# Altium PCB CT310高端控制盒核心板电路V1.3.PcbDoc (part 10 of 10)
Units mil, origin at the board's own origin, x right, y up, seen from the top; angles counter-clockwise.
Board outline 3735.76 x 4625 mil, 2 copper layers (TOP, BOTTOM), stack 10.4 mil thick; 198 components, 362 nets, 1085 pads, 352 vias.
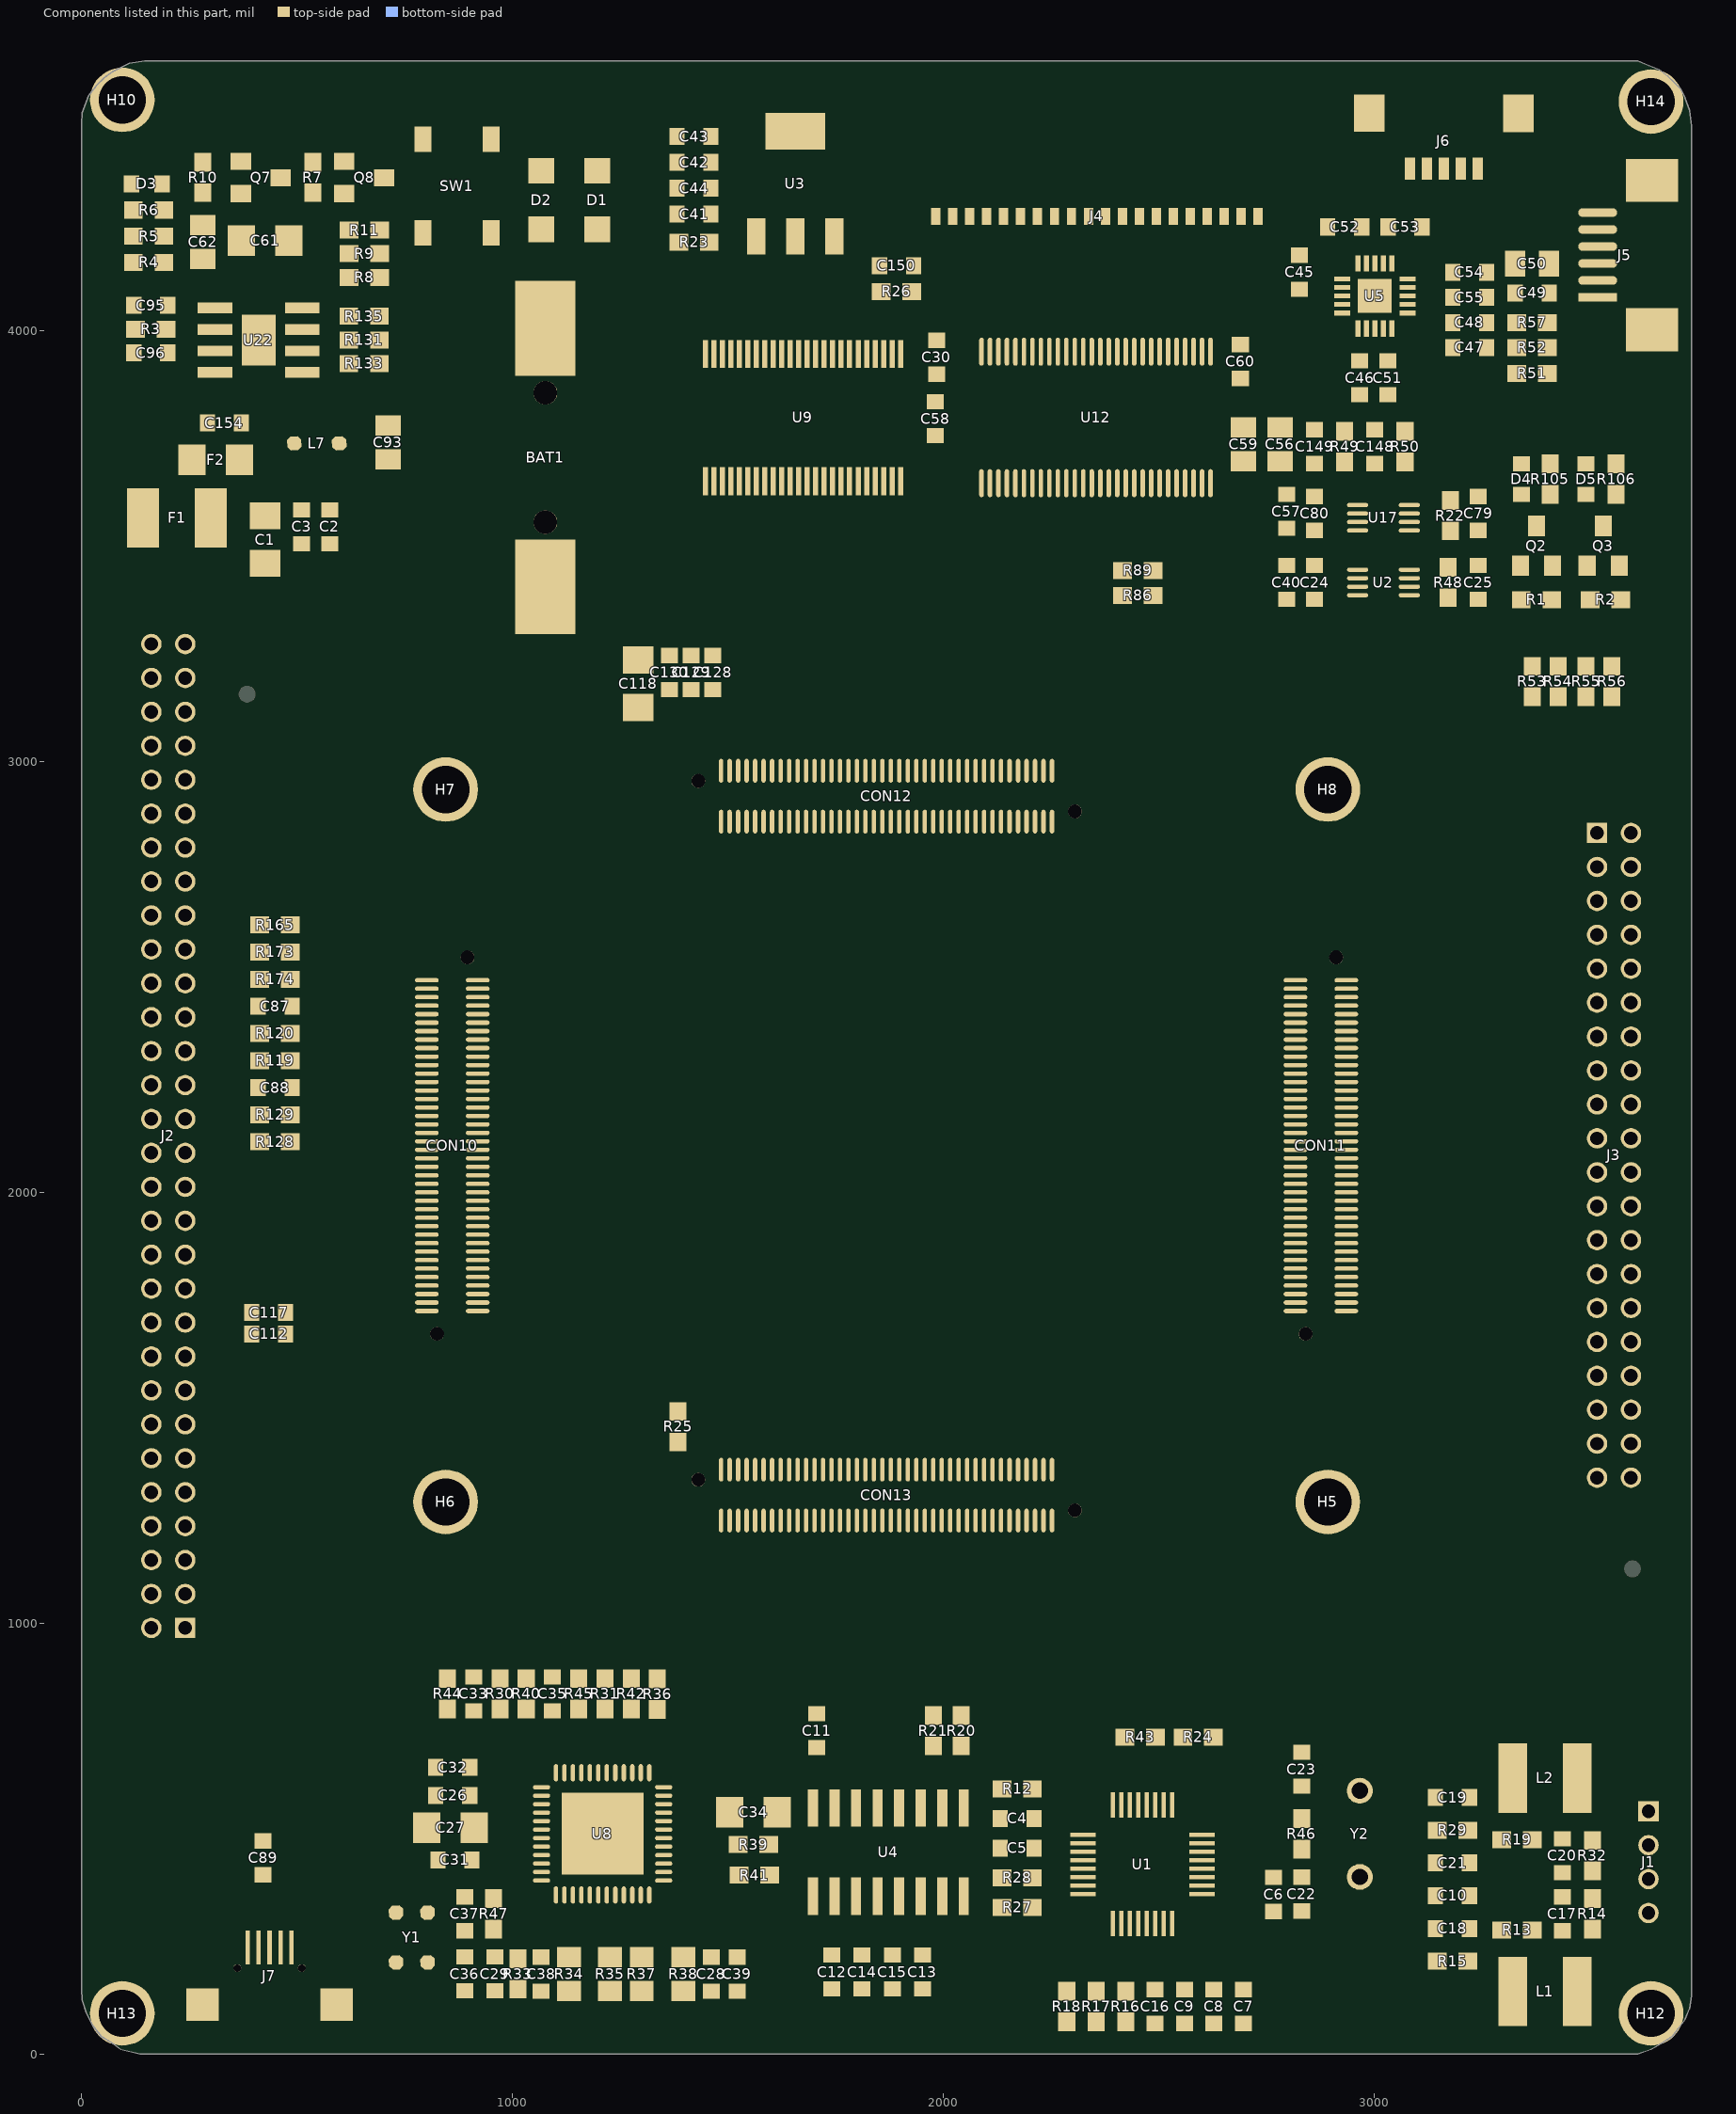
[diagram p10: the components of this part, seen from the top]

## Via types
v1: diameter 22, hole 12, TOP to BOTTOM, tented both sides, 177 vias
v2: diameter 22, hole 12, TOP to BOTTOM, 89 vias
v3: diameter 28, hole 16, TOP to BOTTOM, 37 vias
v4: diameter 30, hole 20, TOP to BOTTOM, tented both sides, 26 vias
v5: diameter 24, hole 12, TOP to BOTTOM, 17 vias
v6: diameter 50, hole 30, TOP to BOTTOM, tented both sides, 5 vias
v7: diameter 40, hole 24, TOP to BOTTOM, 1 vias

## Nets (pads, with @x,y where several pads share a name; then routed paths per layer and width w, separated by ;. In a path a pad name is that pad's centre, name@x,y a point inside that pad or via, vN(x,y) a via of type N, cw(c..) or ccw(c..) an arc to the next point about the centre after c; other vN are vias at no path point) (continued)
pads on no net: "BAT1. " "CON10. " "CON11. " "CON12. " "CON13. " CON12.11 CON12.13 CON12.71 CON12.73 H5.1 H6.1 H7.1 H8.1 H10.1 H12.1 H13.1 H14.1 J2.25 J2.26 J2.55 J2.56 J2.57 J2.58 J2.59 J2.60 J3.1 J3.2 J3.3 J3.4 J3.5 J3.6 J3.19 J3.20 J3.21 J3.22 J3.31 J3.32 J4.17 J4.18 J4.19 J4.20 J5.0 J6.0 J7. U1.23 U5.8 U5.19 U8.11 U8.14 U8.15 U8.17 U8.18 U8.19 U8.23 U8.25 U8.26 U8.27 U8.33 U8.35 U8.36 U9.14 U9.19 U9.22 U9.23 U9.26 U9.27 U9.30 U9.35 U12.37 U12.38 U22.8

## Polygon pours and split planes (outlines as drawn)
no net on Top Overlay (solid): 2738.06,2710.89 ccw(c2648.61,2710.89) 2648.61,2800.33 ccw(c2648.61,2710.89) 2559.17,2710.89 ccw(c2648.61,2710.89) 2648.61,2621.44 ccw(c2648.61,2710.89) 2738.06,2710.89
NetL7_1 on TOP "TOP-N64899462" (solid, pour order 7): 450.76,3912.85 450.76,3834.09 450.76,3781.58 450.76,3683.13 462.92,3670 499.4,3670 505.47,3676.56 505.47,3775.02 523.71,3794.71 523.71,3834.09 523.71,3840.65 560.19,3880.04 560.19,3906.29 554.11,3912.85 450.76,3912.85
DC33V on TOP "TOP-DC33V" (solid, pour order 15): 2250.61,1178.57 2250.61,1382.57 2324.61,1382.57 2324.61,1296.57 2278.61,1296.57 2278.61,1232.57 2311.61,1232.57 2311.61,1178.57 2250.61,1178.57
GND on TOP "TOP-GND 25" (solid, pour order 91): 183 vertices, not listed, extent 1539.1,2800.86 2495.1,3018.07
GND on TOP "TOP-GND 28" (solid, pour order 97): 2895.57,2333.84 2895.58,2333.84 2895.7,2333.96 2895.84,2334.07 2895.98,2334.17 2896.13,2334.25 2896.29,2334.32 2896.46,2334.38 2896.63,2334.42 2896.8,2334.45 2896.98,2334.46 2897.15,2334.46 2897.32,2334.44 2897.49,2334.4 2897.66,2334.36 2897.82,2334.29 2897.98,2334.22 2898.13,2334.13 2898.27,2334.02 2898.4,2333.91 2898.52,2333.78 2898.63,2333.65 2898.73,2333.5 2898.81,2333.35 2898.88,2333.19 2898.94,2333.02 2898.98,2332.85 2899.01,2332.68 2899.02,2332.51 2899.02,2332.46 2899.02,2266.69 2899.01,2266.34 2898.96,2266 2898.89,2265.66 2898.78,2265.32 2898.65,2265 2898.49,2264.69 2898.3,2264.4 2898.09,2264.12 2897.85,2263.86 2897.59,2263.63 2897.32,2263.41 2897.02,2263.23 2896.71,2263.07 2896.39,2262.93 2896.06,2262.83 2895.72,2262.75 2895.37,2262.71 2895.02,2262.69 2894.67,2262.71 2894.33,2262.75 2893.99,2262.83 2893.65,2262.93 2893.33,2263.07 2893.02,2263.23 2892.73,2263.41 2892.45,2263.63 2892.19,2263.86 2892.17,2263.89 2890.96,2265.02 2889.65,2266.04 2888.26,2266.94 2886.8,2267.72 2885.27,2268.37 2883.69,2268.88 2882.08,2269.25 2880.44,2269.49 2878.78,2269.57 2877.13,2269.51 2875.48,2269.31 2873.86,2268.97 2872.27,2268.48 2870.74,2267.86 2869.26,2267.11 2867.85,2266.23 2866.53,2265.24 2865.3,2264.13 2864.17,2262.91 2863.15,2261.61 2862.24,2260.22 2861.46,2258.75 2860.82,2257.23 2860.55,2256.47 2860.4,2256.02 2858.73,2254.35 2858.48,2254.12 2858.2,2253.9 2857.91,2253.72 2857.6,2253.55 2857.27,2253.42 2856.94,2253.32 2856.6,2253.24 2856.25,2253.2 2855.91,2253.18 2855.56,2253.2 2855.21,2253.24 2854.87,2253.32 2854.54,2253.42 2854.21,2253.56 2853.91,2253.72 2853.61,2253.9 2853.33,2254.12 2853.08,2254.35 2852.84,2254.61 2852.63,2254.89 2852.44,2255.18 2852.28,2255.49 2852.15,2255.81 2852.04,2256.15 2851.97,2256.49 2851.92,2256.83 2851.91,2257.18 2851.91,2281.9 2858.29,2281.9 2893.62,2317.23 2893.62,2331.69 2893.99,2332.06 2895.11,2333.28 2895.57,2333.84
GND on TOP "TOP-GND 30" (solid, pour order 101): 230 vertices, not listed, extent 836.16,2035.3 883.27,2200.84
GND on TOP "TOP-GND 32" (solid, pour order 105): 600.08,1992.95 555.67,2037.36 555.43,2037.62 555.22,2037.89 555.03,2038.19 554.87,2038.5 554.74,2038.82 554.63,2039.15 554.56,2039.49 554.51,2039.84 554.5,2040.19 554.51,2040.54 554.56,2040.88 554.63,2041.22 554.74,2041.56 554.87,2041.88 555.03,2042.19 555.22,2042.48 555.43,2042.76 555.67,2043.02 555.93,2043.25 556.2,2043.46 556.5,2043.65 556.81,2043.81 557.13,2043.95 557.46,2044.05 557.8,2044.13 558.15,2044.17 558.46,2044.19 560.37,2044.29 562.27,2044.56 564.14,2045 565.97,2045.59 567.73,2046.34 569.43,2047.25 571.04,2048.3 571.56,2048.69 625.75,2048.69 672.62,2001.81 725.36,2001.81 726.88,2001.88 728.4,2002.08 729.89,2002.41 731.34,2002.87 732.76,2003.45 734.11,2004.16 735.4,2004.98 735.86,2005.31 765.16,2005.31 765.16,1992.95 600.08,1992.95
GND on TOP "TOP-GND 82" (solid, pour order 205): 1407.43,2830.57 1388.62,2839.53 1388.62,3035.57 1483.23,3035.57 1503.62,3018.55 1503.62,3013.48 1487.6,3013.48 1487.6,3011.48 1450.23,3011.48 1450.23,2977.56 1450.22,2977.22 1450.17,2976.87 1450.09,2976.53 1449.99,2976.2 1449.86,2975.87 1449.69,2975.56 1449.51,2975.27 1449.29,2974.99 1449.06,2974.74 1448.8,2974.5 1448.52,2974.29 1448.23,2974.1 1447.92,2973.94 1447.6,2973.81 1447.27,2973.7 1446.92,2973.63 1446.58,2973.58 1446.23,2973.56 1445.88,2973.58 1445.54,2973.63 1445.19,2973.7 1444.86,2973.81 1444.54,2973.94 1444.23,2974.1 1443.99,2974.25 1442.21,2975.34 1440.34,2976.28 1438.39,2977.04 1436.38,2977.64 1434.33,2978.05 1432.25,2978.29 1430.15,2978.34 1428.06,2978.22 1425.99,2977.91 1423.96,2977.42 1421.97,2976.75 1420.05,2975.92 1418.21,2974.92 1416.47,2973.76 1414.83,2972.46 1413.31,2971.01 1411.92,2969.45 1410.68,2967.76 1409.58,2965.98 1408.65,2964.1 1407.88,2962.15 1407.29,2960.15 1406.87,2958.1 1406.63,2956.01 1406.58,2953.92 1406.71,2951.83 1407.02,2949.76 1407.51,2947.72 1408.17,2945.74 1409.01,2943.82 1410.01,2941.98 1411.16,2940.23 1412.47,2938.59 1413.91,2937.08 1415.48,2935.69 1417.16,2934.44 1418.95,2933.35 1420.82,2932.42 1422.77,2931.65 1424.78,2931.06 1426.83,2930.64 1428.91,2930.4 1431,2930.35 1433.09,2930.48 1435.16,2930.79 1437.2,2931.28 1439.18,2931.94 1441.11,2932.78 1442.94,2933.78 1444.69,2934.93 1446.33,2936.24 1447.85,2937.68 1449.23,2939.25 1450.48,2940.93 1451.57,2942.71 1452.46,2944.47 1487.6,2944.47 1487.6,2942.47 1503.68,2942.47 1505.58,2941.87 1507.1,2941.39 1507.1,2895.36 1487.6,2895.36 1487.6,2893.36 1450.23,2893.36 1450.23,2830.57 1407.43,2830.57
GND on TOP "TOP-GND 93" (solid, pour order 227): 623.47,1923.1 623.29,1923.4 623.14,1923.71 623.02,1924.04 622.93,1924.38 622.87,1924.72 622.84,1925.07 622.84,1925.42 622.87,1925.77 622.93,1926.11 623.02,1926.45 623.14,1926.78 623.29,1927.09 623.46,1927.39 623.66,1927.68 623.88,1927.95 624.13,1928.2 624.4,1928.42 624.68,1928.62 624.98,1928.8 625.3,1928.94 625.63,1929.06 625.97,1929.15 626.31,1929.22 626.66,1929.25 626.84,1929.25 756.59,1929.25 758.27,1927.57 765.16,1927.57 765.16,1910.65 626.78,1910.65 626.63,1910.8 626.61,1912.55 626.52,1914.29 626.27,1916.02 625.87,1917.72 625.33,1919.38 624.64,1920.98 623.82,1922.52 623.47,1923.1
GND on TOP "TOP-GND 96" (solid, pour order 233): 680.56,1867.15 680.36,1867.44 680.19,1867.74 680.04,1868.06 679.92,1868.39 679.83,1868.73 679.78,1869.07 679.75,1869.42 679.75,1869.77 679.78,1870.11 679.85,1870.46 679.94,1870.79 680.06,1871.12 680.21,1871.44 680.38,1871.74 680.59,1872.02 680.81,1872.29 681.06,1872.53 681.33,1872.76 681.55,1872.91 763.96,1872.91 765.16,1871.71 765.16,1850.81 687.27,1850.81 684.61,1853.46 684.61,1854.89 684.62,1854.89 684.56,1856.63 684.34,1858.36 683.98,1860.07 683.47,1861.74 682.82,1863.36 682.03,1864.91 681.11,1866.39 680.56,1867.15
GND on TOP "TOP-GND 99" (solid, pour order 239): 836.16,1778.75 836.16,1809.69 836.17,1810.04 836.22,1810.38 836.29,1810.72 836.4,1811.06 836.53,1811.38 836.69,1811.69 836.88,1811.98 837.09,1812.26 837.33,1812.52 837.59,1812.75 837.86,1812.97 838.16,1813.15 838.47,1813.31 838.79,1813.45 839.12,1813.55 839.46,1813.63 839.81,1813.67 840.16,1813.69 840.51,1813.67 840.85,1813.63 841.19,1813.55 841.53,1813.45 841.85,1813.31 842.02,1813.23 843.6,1812.48 845.24,1811.88 846.92,1811.42 848.64,1811.1 850.37,1810.94 852.12,1810.93 853.86,1811.08 855.58,1811.37 857.27,1811.81 858.91,1812.4 860.49,1813.13 862.01,1814 863.44,1814.99 864.79,1816.11 866.03,1817.33 867.16,1818.66 868.16,1820.09 869.04,1821.59 869.79,1823.17 870.39,1824.81 870.86,1826.49 870.97,1827.03 871.29,1828.64 883.27,1828.64 883.27,1778.75 836.16,1778.75
GND on TOP "TOP-GND 101" (solid, pour order 243): 2857.11,2045.68 2878,2066.57 2886.26,2066.57 2886.33,2068.17 2887.35,2068.7 2888.79,2069.53 2890.15,2070.47 2891.42,2071.54 2892.17,2072.25 2892.42,2072.49 2892.7,2072.71 2892.99,2072.9 2893.3,2073.06 2893.62,2073.2 2893.95,2073.31 2894.29,2073.38 2894.64,2073.43 2894.99,2073.45 2895.34,2073.44 2895.68,2073.4 2896.02,2073.32 2896.36,2073.22 2896.68,2073.09 2896.99,2072.93 2897.29,2072.75 2897.57,2072.54 2897.83,2072.3 2898.06,2072.05 2898.28,2071.77 2898.47,2071.48 2898.63,2071.17 2898.77,2070.85 2898.88,2070.52 2898.95,2070.18 2899,2069.83 2899.02,2069.49 2899.02,2069.45 2899.02,1739.04 2875.73,1739.04 2875.41,1739.15 2874.07,1739.55 2872.7,1739.83 2871.32,1740 2869.92,1740.04 2868.53,1739.96 2867.15,1739.75 2865.79,1739.43 2864.89,1739.15 2864.57,1739.04 2851.91,1739.04 2851.91,2045.68 2857.11,2045.68
GND on TOP "TOP-GND 103" (solid, pour order 247): 2225.58,1273.31 2225.58,1292.7 2204.68,1313.6 2204.44,1313.86 2204.23,1314.13 2204.04,1314.43 2203.88,1314.74 2203.75,1315.06 2203.65,1315.39 2203.57,1315.73 2203.52,1316.08 2203.51,1316.43 2203.52,1316.78 2203.57,1317.12 2203.65,1317.46 2203.75,1317.8 2203.88,1318.12 2204.05,1318.43 2204.23,1318.72 2204.45,1319 2204.68,1319.26 2204.94,1319.49 2205.22,1319.71 2205.51,1319.89 2205.82,1320.05 2206.14,1320.19 2206.47,1320.29 2206.82,1320.37 2207.16,1320.41 2207.51,1320.43 2235.61,1320.43 2235.61,1273.31 2225.58,1273.31
GND on TOP "TOP-GND 104" (solid, pour order 249): 2403.78,1105.76 2326.62,1182.93 2326.62,1251.87 2326.77,1252.24 2327.49,1254.2 2328.03,1256.23 2328.4,1258.29 2328.58,1260.37 2328.58,1262.47 2328.4,1264.55 2328.04,1266.62 2327.5,1268.64 2326.79,1270.61 2325.9,1272.5 2324.86,1274.32 2324.22,1275.26 2324.22,1275.27 2324.03,1275.56 2323.87,1275.87 2323.74,1276.19 2323.63,1276.52 2323.56,1276.86 2323.51,1277.21 2323.49,1277.56 2323.51,1277.91 2323.55,1278.25 2323.63,1278.59 2323.73,1278.93 2323.86,1279.25 2324.02,1279.56 2324.21,1279.85 2324.42,1280.13 2324.66,1280.39 2324.91,1280.63 2325.19,1280.84 2325.48,1281.03 2325.79,1281.19 2326.11,1281.32 2326.45,1281.43 2326.79,1281.51 2327.13,1281.55 2327.48,1281.57 2327.49,1281.57 2339.62,1281.57 2339.62,1397.57 2245.27,1397.57 2244.93,1397.59 2244.58,1397.63 2244.24,1397.71 2243.91,1397.81 2243.58,1397.95 2243.28,1398.11 2242.98,1398.3 2242.7,1398.51 2242.45,1398.75 2242.21,1399 2242,1399.28 2241.81,1399.57 2241.65,1399.88 2241.52,1400.21 2241.41,1400.54 2241.34,1400.88 2241.29,1401.23 2241.28,1401.57 2241.29,1401.92 2241.34,1402.27 2241.41,1402.61 2241.52,1402.94 2241.65,1403.26 2241.81,1403.57 2242,1403.87 2242.21,1404.14 2242.45,1404.4 2245.61,1407.57 2309,1407.57 2403.78,1502.35 2404.04,1502.59 2404.32,1502.8 2404.61,1502.99 2404.92,1503.15 2405.24,1503.28 2405.58,1503.39 2405.92,1503.46 2406.26,1503.51 2406.61,1503.52 2406.96,1503.51 2407.31,1503.46 2407.65,1503.39 2407.98,1503.28 2408.3,1503.15 2408.61,1502.99 2408.91,1502.8 2409.18,1502.59 2409.44,1502.35 2409.68,1502.09 2409.89,1501.82 2410.08,1501.52 2410.24,1501.21 2410.37,1500.89 2410.48,1500.56 2410.55,1500.22 2410.6,1499.87 2410.61,1499.53 2410.61,1108.59 2410.6,1108.24 2410.55,1107.89 2410.48,1107.55 2410.37,1107.22 2410.24,1106.9 2410.08,1106.59 2409.89,1106.29 2409.68,1106.02 2409.44,1105.76 2409.18,1105.52 2408.91,1105.31 2408.61,1105.12 2408.3,1104.96 2407.98,1104.83 2407.65,1104.72 2407.31,1104.65 2406.96,1104.6 2406.61,1104.59 2406.26,1104.6 2405.92,1104.65 2405.58,1104.72 2405.24,1104.83 2404.92,1104.96 2404.61,1105.12 2404.32,1105.31 2404.04,1105.52 2403.78,1105.76
GND on TOP "TOP-GND 127" (solid, pour order 295): 1094.88,396.84 1094.88,624.3 1322.34,624.3 1322.34,396.84 1094.88,396.84
GND on TOP "TOP-GND 97" (solid, pour order 235): 954.28,1849.71 954.28,1887.2 966.39,1887.2 969.73,1890.54 978.46,1890.54 987.61,1881.39 987.61,1853.29 987.6,1852.94 987.55,1852.59 987.48,1852.25 987.37,1851.92 987.24,1851.6 987.08,1851.29 986.89,1850.99 986.68,1850.71 986.44,1850.46 986.18,1850.22 985.91,1850.01 985.61,1849.82 985.3,1849.66 984.98,1849.53 984.65,1849.42 984.31,1849.35 983.96,1849.3 983.61,1849.29 983.26,1849.3 982.92,1849.35 982.58,1849.42 982.24,1849.53 981.92,1849.66 981.87,1849.68 980.35,1850.34 978.78,1850.86 977.16,1851.24 975.52,1851.48 973.87,1851.57 972.21,1851.52 970.56,1851.33 968.94,1850.99 967.35,1850.51 965.81,1849.9 964.33,1849.15 962.92,1848.28 961.59,1847.29 960.94,1846.73 960.67,1846.51 960.38,1846.31 960.08,1846.14 959.76,1846 959.43,1845.88 959.1,1845.8 958.75,1845.74 958.4,1845.72 958.05,1845.72 957.71,1845.75 957.36,1845.82 957.03,1845.91 956.7,1846.04 956.39,1846.19 956.09,1846.37 955.8,1846.57 955.54,1846.8 955.29,1847.05 955.07,1847.32 954.88,1847.6 954.71,1847.91 954.56,1848.23 954.45,1848.56 954.36,1848.89 954.3,1849.24 954.28,1849.59 954.28,1849.71
GND on BOTTOM "BOTTOM-GND 11" (solid, pour order 323): 289 vertices, not listed, extent 2004.8,2730.57 2103.61,3172.07
GND on BOTTOM "BOTTOM-GND 12" (solid, pour order 325): 2729.04,2682.9 2727.75,2684.32 2726.34,2685.62 2724.82,2686.79 2723.2,2687.83 2721.5,2688.72 2719.73,2689.46 2717.9,2690.04 2716.03,2690.47 2715.71,2690.52 2715.08,2690.62 2696.67,2709.03 2696.67,3251.68 2697.42,3252.74 2697.53,3252.88 2697.64,3253.01 2697.77,3253.13 2697.91,3253.24 2698.05,3253.33 2698.2,3253.42 2698.36,3253.49 2698.53,3253.54 2698.7,3253.58 2698.87,3253.61 2699.05,3253.62 2699.22,3253.61 2699.39,3253.59 2699.57,3253.56 2699.73,3253.51 2699.89,3253.45 2700.05,3253.37 2700.2,3253.28 2700.34,3253.17 2700.47,3253.06 2700.59,3252.93 2700.7,3252.8 2700.71,3252.78 2701.11,3252.24 2701.11,3224.94 2736.11,3189.94 2736.11,2685.46 2736.1,2685.11 2736.05,2684.76 2735.98,2684.42 2735.87,2684.09 2735.74,2683.77 2735.58,2683.46 2735.39,2683.16 2735.18,2682.89 2734.94,2682.63 2734.68,2682.39 2734.41,2682.18 2734.11,2681.99 2733.8,2681.83 2733.48,2681.7 2733.15,2681.6 2732.81,2681.52 2732.46,2681.47 2732.11,2681.46 2731.76,2681.47 2731.42,2681.52 2731.08,2681.6 2730.74,2681.7 2730.42,2681.83 2730.11,2681.99 2729.82,2682.18 2729.54,2682.39 2729.28,2682.63 2729.05,2682.89 2729.04,2682.9
GND on BOTTOM "BOTTOM-GND 32" (solid, pour order 365): 280 vertices, not listed, extent 1853.02,2698.57 2003.17,2745.58
no net on Mechanical 16 (solid): 3607.98,-459.43 ccw(c3568.61,-459.43) 3568.61,-420.06 ccw(c3568.61,-459.43) 3529.24,-459.43 ccw(c3568.61,-459.43) 3568.61,-498.8 ccw(c3568.61,-459.43) 3607.98,-459.43
no net on PLACE_BOUND_TOP (solid): 3637.98,1125.57 ccw(c3598.61,1125.57) 3598.61,1164.94 ccw(c3598.61,1125.57) 3559.24,1125.57 ccw(c3598.61,1125.57) 3598.61,1086.2 ccw(c3598.61,1125.57) 3637.98,1125.57
no net on PLACE_BOUND_TOP (solid): 422.98,3155.57 ccw(c383.61,3155.57) 383.61,3194.94 ccw(c383.61,3155.57) 344.24,3155.57 ccw(c383.61,3155.57) 383.61,3116.2 ccw(c383.61,3155.57) 422.98,3155.57

## Keep-outs
TOP:
  circle w1: c3598.61,1125.57 r39.37
  circle w1: c3598.61,1125.57 r39.37
  circle w1: c383.61,3155.57 r39.37
  circle w1: c383.61,3155.57 r39.37
Keep-Out Layer:
  lines w5: 0,150 ccw(c150,150) 150,0 ; 0,150.76 0,4479.24 ; 0,4475 cw(c150,4475) 150,4625 ; 138.26,0 235.76,0 275.76,40 590.76,40 630.76,0 645.76,0 3590.76,0 ; 145.76,4625 3585.76,4625 cw(c3585.76,4475) 3735.76,4475 3735.76,145 ; 3585.76,0 ccw(c3585.76,150) 3735.76,150

## Other copper
TOP:
  rectangle net NetL7_1: 470.76,3675 525.76,3850
  rectangle net VSYS_K: 555.76,3630 645.76,3805
  rectangle net VSYS_K: 960.76,1610 1105.76,1705
  rectangle net VSYS_K: 870.76,1610 960.76,1715
  rectangle net VSYS_K: 515.82,1715 960.76,1768.41
  rectangle: 3015.76,4460 3120.76,4550
  rectangle: 1860.76,4380 1940.76,4585
  rectangle: 2770.76,4380 2850.76,4580
  region net VSYS_K: 1105.76,1610 1205.76,1610 1220.76,1625 1220.76,1755 1285.76,1820 1285.76,2415 1230.76,2415 1230.76,1830 1100.76,1700
  pour cut-out: 919.62,2544.91 917.75,2554.27 912.45,2562.21 904.51,2567.52 895.14,2569.38 885.78,2567.52 877.84,2562.21 872.54,2554.27 870.67,2544.91 872.54,2535.54 877.84,2527.6 885.78,2522.3 895.14,2520.43 904.51,2522.3 912.45,2527.6 917.75,2535.54 919.62,2544.91
  pour cut-out: 925.65,1280.91 924.09,1296.79 919.46,1312.06 911.94,1326.13 901.81,1338.46 889.48,1348.59 875.41,1356.11 860.14,1360.74 844.26,1362.3 828.38,1360.74 813.11,1356.11 799.04,1348.59 786.71,1338.46 776.58,1326.13 769.06,1312.06 764.43,1296.79 762.87,1280.91 764.43,1265.03 769.06,1249.76 776.58,1235.69 786.71,1223.36 799.04,1213.23 813.11,1205.71 828.38,1201.08 844.26,1199.52 860.14,1201.08 875.41,1205.71 889.48,1213.23 901.81,1223.36 911.94,1235.69 919.46,1249.76 924.09,1265.03 925.65,1280.91
  pour cut-out: 925.65,2934.45 924.09,2950.33 919.46,2965.6 911.94,2979.67 901.81,2992 889.48,3002.13 875.41,3009.65 860.14,3014.28 844.26,3015.84 828.38,3014.28 813.11,3009.65 799.04,3002.13 786.71,2992 776.58,2979.67 769.06,2965.6 764.43,2950.33 762.87,2934.45 764.43,2918.57 769.06,2903.3 776.58,2889.23 786.71,2876.89 799.04,2866.77 813.11,2859.25 828.38,2854.62 844.26,2853.06 860.14,2854.62 875.41,2859.25 889.48,2866.77 901.81,2876.89 911.94,2889.23 919.46,2903.3 924.09,2918.57 925.65,2934.45
  pour cut-out: 2973.01,2934.45 2971.45,2950.33 2966.82,2965.6 2959.29,2979.67 2949.17,2992 2936.84,3002.13 2922.77,3009.65 2907.5,3014.28 2891.62,3015.84 2875.74,3014.28 2860.47,3009.65 2846.4,3002.13 2834.06,2992 2823.94,2979.67 2816.42,2965.6 2811.79,2950.33 2810.22,2934.45 2811.79,2918.57 2816.42,2903.3 2823.94,2889.23 2834.06,2876.89 2846.4,2866.77 2860.47,2859.25 2875.74,2854.62 2891.62,2853.06 2907.5,2854.62 2922.77,2859.25 2936.84,2866.77 2949.17,2876.89 2959.29,2889.23 2966.82,2903.3 2971.45,2918.57 2973.01,2934.45
  pour cut-out: 2972.91,1280.91 2971.35,1296.79 2966.72,1312.06 2959.2,1326.13 2949.07,1338.46 2936.74,1348.59 2922.67,1356.11 2907.4,1360.74 2891.52,1362.3 2875.64,1360.74 2860.37,1356.11 2846.3,1348.59 2833.97,1338.46 2823.84,1326.13 2816.32,1312.06 2811.69,1296.79 2810.13,1280.91 2811.69,1265.03 2816.32,1249.76 2823.84,1235.69 2833.97,1223.36 2846.3,1213.23 2860.37,1205.71 2875.64,1201.08 2891.52,1199.52 2907.4,1201.08 2922.67,1205.71 2936.74,1213.23 2949.07,1223.36 2959.2,1235.69 2966.72,1249.76 2971.35,1265.03 2972.91,1280.91
  pour cut-out: 1107.61,409.57 1107.61,611.57 1309.62,611.57 1309.62,409.57 1107.61,409.57
  pour cut-out: 2233.86,3103.07 2482.81,3103.07 2483.16,3103.05 2483.51,3103.01 2483.85,3102.93 2484.18,3102.83 2484.5,3102.69 2484.81,3102.53 2485.11,3102.35 2485.38,3102.13 2485.64,3101.9 2485.88,3101.64 2486.09,3101.36 2486.28,3101.07 2486.44,3100.76 2486.57,3100.44 2486.67,3100.1 2486.75,3099.76 2486.8,3099.42 2486.81,3099.07 2486.8,3098.72 2486.75,3098.37 2486.67,3098.03 2486.57,3097.7 2486.44,3097.38 2486.27,3097.07 2486.09,3096.77 2485.87,3096.5 2485.64,3096.24 2484.47,3095.07 2235.52,3095.07 2235.18,3095.09 2234.83,3095.13 2234.49,3095.21 2234.16,3095.31 2233.83,3095.45 2233.52,3095.61 2233.23,3095.8 2232.95,3096.01 2232.7,3096.25 2232.46,3096.5 2232.25,3096.78 2232.06,3097.07 2231.9,3097.38 2231.77,3097.71 2231.66,3098.04 2231.59,3098.38 2231.54,3098.73 2231.52,3099.07 2231.54,3099.42 2231.59,3099.77 2231.66,3100.11 2231.77,3100.44 2231.9,3100.76 2232.06,3101.07 2232.25,3101.37 2232.46,3101.64 2232.7,3101.9 2233.86,3103.07
  pour cut-out: 2481.36,3053.07 2246.61,3053.07 2245.09,3053.01 2243.57,3052.81 2242.08,3052.48 2240.63,3052.02 2239.22,3051.43 2238.31,3050.98 2237,3050.27 2234.53,3052.74 2241.86,3060.07 2483.53,3060.07 2483.71,3060.06 2483.88,3060.04 2484.05,3060 2484.22,3059.95 2484.38,3059.88 2484.53,3059.8 2484.68,3059.71 2484.82,3059.6 2484.95,3059.48 2485.06,3059.35 2485.17,3059.22 2485.26,3059.07 2485.34,3058.91 2485.41,3058.75 2485.46,3058.59 2485.5,3058.42 2485.52,3058.24 2485.53,3058.07 2485.52,3057.89 2485.5,3057.72 2485.46,3057.55 2485.41,3057.38 2485.34,3057.22 2485.26,3057.07 2485.17,3056.92 2485.06,3056.78 2484.95,3056.65 2481.36,3053.07
  pour cut-out: 1547.61,4031.01 1552.61,4026.01 1552.61,4019.24 1549.34,4015.96 1549.34,3985.78 1538.97,3985.78 1538.97,4054.61 1541.21,4056.85 1542.93,4055.14 1543.08,4054.74 1543.85,4052.98 1544.76,4051.3 1545.82,4049.7 1547.02,4048.2 1547.61,4047.54
  pour cut-out: 2052.43,3103.73 2054.08,3103.59 2055.74,3103.59 2056.86,3103.67 2057.21,3103.69 2057.56,3103.68 2057.91,3103.64 2058.25,3103.57 2058.59,3103.47 2058.91,3103.34 2059.22,3103.19 2059.52,3103 2059.8,3102.8 2060.06,3102.56 2060.3,3102.31 2060.52,3102.04 2060.71,3101.75 2060.87,3101.44 2061.01,3101.12 2061.12,3100.79 2061.2,3100.45 2061.26,3100.1 2061.28,3099.75 2061.28,3099.69 2061.28,3013.48 2047.91,3013.48 2047.91,3099.76 2047.93,3100.11 2047.97,3100.46 2048.05,3100.8 2048.15,3101.13 2048.29,3101.46 2048.45,3101.76 2048.63,3102.06 2048.85,3102.34 2049.08,3102.59 2049.34,3102.83 2049.62,3103.04 2049.91,3103.23 2050.22,3103.39 2050.54,3103.52 2050.88,3103.63 2051.22,3103.7 2051.56,3103.75 2051.91,3103.76 2052.26,3103.75 2052.43,3103.73
  pour cut-out: 1897.26,3103.54 1903.8,3097 1903.8,3013.48 1890.43,3013.48 1890.43,3100.71 1890.45,3101.06 1890.49,3101.4 1890.57,3101.75 1890.67,3102.08 1890.81,3102.4 1890.97,3102.71 1891.15,3103 1891.37,3103.28 1891.6,3103.54 1891.86,3103.77 1892.14,3103.99 1892.43,3104.17 1892.74,3104.33 1893.06,3104.47 1893.4,3104.57 1893.74,3104.65 1894.08,3104.69 1894.43,3104.71 1894.78,3104.69 1895.13,3104.65 1895.47,3104.57 1895.8,3104.47 1896.12,3104.33 1896.43,3104.17 1896.73,3103.99 1897,3103.77 1897.26,3103.54
  pour cut-out: 2970.02,2527.25 2935.34,2527.25 2934.99,2527.27 2934.65,2527.31 2934.31,2527.39 2933.97,2527.49 2933.65,2527.63 2933.34,2527.79 2933.05,2527.98 2932.77,2528.19 2932.51,2528.42 2932.28,2528.68 2932.06,2528.96 2931.88,2529.25 2931.72,2529.56 2931.58,2529.88 2931.48,2530.22 2931.4,2530.56 2931.36,2530.9 2931.34,2531.25 2931.36,2531.6 2931.4,2531.95 2931.48,2532.29 2931.58,2532.62 2931.72,2532.94 2931.85,2533.2 2932.79,2535.07 2933.56,2537.02 2934.16,2539.03 2934.59,2541.08 2934.83,2543.16 2934.89,2545.25 2934.77,2547.34 2934.47,2549.41 2933.99,2551.45 2933.72,2552.33 2933.62,2552.67 2933.56,2553.01 2933.53,2553.36 2933.52,2553.71 2933.55,2554.06 2933.61,2554.4 2933.7,2554.74 2933.81,2555.07 2933.96,2555.38 2934.13,2555.69 2934.33,2555.98 2934.55,2556.24 2934.79,2556.49 2935.06,2556.72 2935.34,2556.92 2935.64,2557.1 2935.96,2557.25 2936.28,2557.37 2936.62,2557.47 2936.96,2557.53 2937.31,2557.56 2937.52,2557.57 2963.23,2557.57 2984.37,2536.43 2984.37,2484.12 2976.85,2476.6 2976.59,2476.36 2976.32,2476.15 2976.02,2475.96 2975.71,2475.8 2975.39,2475.67 2975.06,2475.56 2974.72,2475.49 2974.37,2475.44 2974.02,2475.43 2973.67,2475.44 2973.33,2475.49 2972.99,2475.56 2972.66,2475.67 2972.33,2475.8 2972.02,2475.96 2971.73,2476.15 2971.45,2476.36 2971.2,2476.6 2970.96,2476.86 2970.75,2477.13 2970.56,2477.43 2970.4,2477.74 2970.26,2478.06 2970.16,2478.39 2970.08,2478.73 2970.04,2479.08 2970.02,2479.43 2970.02,2527.25
  pour cut-out: 3638.33,1125.57 3636.97,1135.85 3633.01,1145.43 3626.7,1153.65 3618.47,1159.96 3608.89,1163.93 3598.61,1165.28 3588.34,1163.93 3578.76,1159.96 3570.53,1153.65 3564.22,1145.43 3560.25,1135.85 3558.9,1125.57 3560.25,1115.29 3564.22,1105.71 3570.53,1097.49 3578.76,1091.18 3588.34,1087.21 3598.61,1085.86 3608.89,1087.21 3618.47,1091.18 3626.7,1097.49 3633.01,1105.71 3636.97,1115.29 3638.33,1125.57
  pour cut-out: 423.33,3155.57 421.97,3165.85 418.01,3175.43 411.7,3183.65 403.47,3189.96 393.89,3193.93 383.61,3195.28 373.34,3193.93 363.76,3189.96 355.53,3183.65 349.22,3175.43 345.25,3165.85 343.9,3155.57 345.25,3145.29 349.22,3135.71 355.53,3127.49 363.76,3121.18 373.34,3117.21 383.61,3115.86 393.89,3117.21 403.47,3121.18 411.7,3127.49 418.01,3135.71 421.97,3145.29 423.33,3155.57
BOTTOM:
  pour cut-out: 163 vertices and 0 holes, not listed, extent 1543.35,3718.92 1940.61,3894.64
  pour cut-out: 848.76,1670.88 846.9,1680.25 841.59,1688.19 833.65,1693.49 824.29,1695.35 814.92,1693.49 806.98,1688.19 801.68,1680.25 799.81,1670.88 801.68,1661.52 806.98,1653.58 814.92,1648.27 824.29,1646.41 833.65,1648.27 841.59,1653.58 846.9,1661.52 848.76,1670.88
  pour cut-out: 1455.05,1332.3 1453.19,1341.66 1447.88,1349.6 1439.94,1354.91 1430.58,1356.77 1421.21,1354.91 1413.27,1349.6 1407.97,1341.66 1406.11,1332.3 1407.97,1322.93 1413.27,1314.99 1421.21,1309.69 1430.58,1307.83 1439.94,1309.69 1447.88,1314.99 1453.19,1322.93 1455.05,1332.3
  pour cut-out: 925.65,2934.45 924.09,2950.33 919.46,2965.6 911.94,2979.67 901.81,2992 889.48,3002.13 875.41,3009.65 860.14,3014.28 844.26,3015.84 828.38,3014.28 813.11,3009.65 799.04,3002.13 786.71,2992 776.58,2979.67 769.06,2965.6 764.43,2950.33 762.87,2934.45 764.43,2918.57 769.06,2903.3 776.58,2889.23 786.71,2876.89 799.04,2866.77 813.11,2859.25 828.38,2854.62 844.26,2853.06 860.14,2854.62 875.41,2859.25 889.48,2866.77 901.81,2876.89 911.94,2889.23 919.46,2903.3 924.09,2918.57 925.65,2934.45
  pour cut-out: 1455.05,2954.35 1453.19,2963.71 1447.88,2971.65 1439.94,2976.96 1430.58,2978.82 1421.21,2976.96 1413.27,2971.65 1407.97,2963.71 1406.11,2954.35 1407.97,2944.98 1413.27,2937.04 1421.21,2931.74 1430.58,2929.87 1439.94,2931.74 1447.88,2937.04 1453.19,2944.98 1455.05,2954.35
  pour cut-out: 2329.07,2883.49 2327.21,2892.85 2321.91,2900.79 2313.97,2906.1 2304.6,2907.96 2295.24,2906.1 2287.3,2900.79 2281.99,2892.85 2280.13,2883.49 2281.99,2874.12 2287.3,2866.18 2295.24,2860.88 2304.6,2859.02 2313.97,2860.88 2321.91,2866.18 2327.21,2874.12 2329.07,2883.49
  pour cut-out: 2329.07,1261.44 2327.21,1270.81 2321.91,1278.75 2313.97,1284.05 2304.6,1285.91 2295.24,1284.05 2287.3,1278.75 2281.99,1270.81 2280.13,1261.44 2281.99,1252.08 2287.3,1244.14 2295.24,1238.83 2304.6,1236.97 2313.97,1238.83 2321.91,1244.14 2327.21,1252.08 2329.07,1261.44
  pour cut-out: 2972.91,1280.91 2971.35,1296.79 2966.72,1312.06 2959.2,1326.13 2949.07,1338.46 2936.74,1348.59 2922.67,1356.11 2907.4,1360.74 2891.52,1362.3 2875.64,1360.74 2860.37,1356.11 2846.3,1348.59 2833.97,1338.46 2823.84,1326.13 2816.32,1312.06 2811.69,1296.79 2810.13,1280.91 2811.69,1265.03 2816.32,1249.76 2823.84,1235.69 2833.97,1223.36 2846.3,1213.23 2860.37,1205.71 2875.64,1201.08 2891.52,1199.52 2907.4,1201.08 2922.67,1205.71 2936.74,1213.23 2949.07,1223.36 2959.2,1235.69 2966.72,1249.76 2971.35,1265.03 2972.91,1280.91
  pour cut-out: 798.44,2361.01 975.79,2361.01 985.23,2351.57 990.2,2351.57 990.2,2348.11 989.33,2347.83 987.76,2347.3 986.24,2346.64 984.78,2345.84 983.4,2344.92 982.11,2343.89 981.1,2342.94 980.73,2342.57 789.66,2342.57 789.31,2342.59 788.97,2342.63 788.62,2342.71 788.29,2342.81 787.97,2342.95 787.66,2343.11 787.37,2343.3 787.09,2343.51 786.83,2343.75 786.6,2344 786.38,2344.28 786.2,2344.57 786.04,2344.88 785.9,2345.21 785.8,2345.54 785.72,2345.88 785.68,2346.23 785.66,2346.57 785.68,2346.92 785.72,2347.27 785.8,2347.61 785.9,2347.94 786.04,2348.26 786.2,2348.57 786.38,2348.87 786.6,2349.14 786.83,2349.4 798.44,2361.01
  pour cut-out: 2011.74,3173.97 2011.89,3174.04 2012.06,3174.1 2012.22,3174.15 2012.4,3174.18 2012.57,3174.2 2012.74,3174.2 2012.92,3174.19 2013.09,3174.16 2013.26,3174.12 2013.42,3174.06 2013.58,3173.99 2013.74,3173.9 2013.88,3173.81 2014.01,3173.69 2014.14,3173.57 2014.25,3173.44 2014.35,3173.3 2014.44,3173.15 2014.52,3172.99 2014.58,3172.83 2014.63,3172.66 2014.66,3172.49 2014.68,3172.33 2014.85,3170.68 2015.17,3169.06 2015.64,3167.47 2016.23,3165.92 2016.97,3164.43 2017.82,3163.01 2018.8,3161.67 2019.89,3160.43 2021.09,3159.28 2022.38,3158.24 2023.76,3157.31 2025.21,3156.51 2026.72,3155.84 2028.29,3155.31 2029.9,3154.91 2031.54,3154.66 2033.19,3154.55 2034.85,3154.58 2036.5,3154.76 2037.16,3154.87 2037.17,3154.87 2037.51,3154.92 2037.86,3154.94 2038.21,3154.93 2038.55,3154.89 2038.9,3154.82 2039.23,3154.72 2039.55,3154.59 2039.87,3154.43 2040.16,3154.24 2040.44,3154.03 2040.7,3153.8 2040.94,3153.55 2041.16,3153.27 2041.35,3152.98 2041.51,3152.67 2041.65,3152.35 2041.76,3152.02 2041.84,3151.68 2041.89,3151.34 2041.91,3150.99 2041.91,3150.94 2041.91,3136.45 2041.54,3136.08 2040.41,3134.86 2039.39,3133.55 2038.49,3132.16 2037.72,3130.69 2037.08,3129.16 2036.57,3127.58 2036.2,3125.97 2035.98,3124.32 2035.9,3122.67 2035.9,3122.38 2035.9,3121.95 1996.88,3082.93 1996.62,3082.69 1996.35,3082.48 1996.05,3082.29 1995.74,3082.13 1995.42,3082 1995.09,3081.9 1994.75,3081.82 1994.4,3081.77 1994.05,3081.76 1993.7,3081.77 1993.36,3081.82 1993.02,3081.9 1992.68,3082 1992.36,3082.13 1992.05,3082.3 1991.76,3082.48 1991.48,3082.7 1991.22,3082.93 1990.99,3083.19 1990.77,3083.47 1990.59,3083.76 1990.43,3084.07 1990.29,3084.39 1990.19,3084.72 1990.11,3085.07 1990.07,3085.41 1990.05,3085.76 1990.05,3159.62 2002.14,3171.71 2010.4,3171.71 2010.47,3173.31 2011.5,3173.84 2011.74,3173.97
  pour cut-out: 1930.62,3110.76 1930.63,3111.11 1930.68,3111.46 1930.75,3111.8 1930.86,3112.13 1930.99,3112.46 1931.15,3112.76 1931.34,3113.06 1931.55,3113.34 1931.79,3113.59 1932.04,3113.83 1932.32,3114.04 1932.62,3114.23 1932.93,3114.39 1933.25,3114.52 1933.58,3114.63 1933.92,3114.7 1934.27,3114.75 1934.62,3114.76 1934.96,3114.75 1935.14,3114.73 1936.79,3114.59 1938.45,3114.59 1940.1,3114.73 1941.73,3115.02 1941.74,3115.02 1942.09,3115.08 1942.43,3115.12 1942.78,3115.12 1943.13,3115.09 1943.47,3115.02 1943.81,3114.93 1944.14,3114.82 1944.46,3114.67 1944.76,3114.49 1945.04,3114.29 1945.31,3114.07 1945.56,3113.82 1945.78,3113.56 1945.98,3113.27 1946.16,3112.97 1946.31,3112.65 1946.43,3112.33 1946.52,3111.99 1946.58,3111.64 1946.61,3111.3 1946.61,3111.12 1946.61,3080.96 1937.44,3071.79 1937.19,3071.55 1936.91,3071.34 1936.62,3071.15 1936.31,3070.99 1935.98,3070.86 1935.65,3070.75 1935.31,3070.68 1934.96,3070.63 1934.62,3070.62 1934.27,3070.63 1933.92,3070.68 1933.58,3070.75 1933.25,3070.86 1932.92,3070.99 1932.62,3071.15 1932.32,3071.34 1932.04,3071.55 1931.79,3071.79 1931.55,3072.05 1931.34,3072.32 1931.15,3072.62 1930.99,3072.93 1930.86,3073.25 1930.75,3073.58 1930.68,3073.92 1930.63,3074.27 1930.62,3074.62 1930.62,3110.76
  pour cut-out: 1952.62,3050.19 1957.22,3054.79 1957.48,3055.02 1957.75,3055.24 1958.05,3055.42 1958.36,3055.59 1958.68,3055.72 1959.01,3055.82 1959.35,3055.9 1959.7,3055.94 1960.05,3055.96 1960.4,3055.94 1960.74,3055.9 1961.08,3055.82 1961.42,3055.72 1961.74,3055.58 1962.05,3055.42 1962.34,3055.24 1962.62,3055.02 1962.88,3054.79 1963.11,3054.53 1963.32,3054.25 1963.51,3053.96 1963.67,3053.65 1963.81,3053.33 1963.91,3052.99 1963.99,3052.65 1964.03,3052.31 1964.05,3051.96 1964.05,2783.51 1964.04,2783.34 1964.02,2783.17 1963.98,2783 1963.93,2782.83 1963.86,2782.67 1963.78,2782.51 1963.69,2782.37 1963.58,2782.23 1963.46,2782.1 1963.33,2781.98 1963.2,2781.88 1963.05,2781.78 1962.89,2781.7 1962.73,2781.63 1962.57,2781.58 1962.4,2781.54 1962.22,2781.52 1962.2,2781.52 1960.55,2781.32 1958.93,2780.99 1957.83,2780.67 1957.5,2780.58 1957.15,2780.52 1956.81,2780.49 1956.46,2780.49 1956.11,2780.51 1955.76,2780.57 1955.43,2780.66 1955.1,2780.78 1954.78,2780.93 1954.48,2781.1 1954.19,2781.3 1953.92,2781.52 1953.68,2781.77 1953.45,2782.04 1953.25,2782.32 1953.07,2782.62 1952.93,2782.94 1952.81,2783.26 1952.71,2783.6 1952.65,2783.94 1952.62,2784.29 1952.62,2784.48 1952.62,3050.19
  pour cut-out: 2093.14,2899.73 2094.79,2899.59 2096.45,2899.59 2098.1,2899.73 2099.73,2900.02 2100.57,2900.23 2100.91,2900.3 2101.26,2900.35 2101.6,2900.37 2101.95,2900.35 2102.3,2900.31 2102.64,2900.23 2102.97,2900.13 2103.3,2899.99 2103.6,2899.83 2103.9,2899.65 2104.18,2899.43 2104.43,2899.2 2104.67,2898.94 2104.88,2898.67 2105.07,2898.37 2105.23,2898.06 2105.37,2897.74 2105.47,2897.41 2105.55,2897.07 2105.6,2896.72 2105.61,2896.37 2105.61,2775.96 2100.41,2770.76 2100.15,2770.52 2099.88,2770.31 2099.58,2770.12 2099.27,2769.96 2098.95,2769.82 2098.62,2769.72 2098.28,2769.64 2097.93,2769.6 2097.58,2769.58 2097.23,2769.6 2096.89,2769.64 2096.55,2769.72 2096.21,2769.82 2095.89,2769.96 2095.58,2770.12 2095.29,2770.31 2095.01,2770.52 2094.75,2770.75 2094.52,2771.01 2094.42,2771.13 2093.44,2772.47 2092.35,2773.71 2091.99,2774.08 2091.62,2774.45 2091.62,2784.96 2088.62,2787.96 2088.62,2895.76 2088.63,2896.11 2088.68,2896.46 2088.75,2896.8 2088.86,2897.13 2088.99,2897.46 2089.15,2897.76 2089.34,2898.06 2089.55,2898.34 2089.79,2898.59 2090.04,2898.83 2090.32,2899.04 2090.62,2899.23 2090.93,2899.39 2091.25,2899.52 2091.58,2899.63 2091.92,2899.7 2092.27,2899.75 2092.62,2899.76 2092.96,2899.75 2093.14,2899.73
  pour cut-out: 1772.64,2764.93 1772.64,3036.71 1773.8,3037.9 1774.85,3039.18 1775.79,3040.55 1776.6,3042 1777.28,3043.51 1777.83,3045.07 1778.24,3046.68 1778.51,3048.31 1778.63,3049.97 1778.61,3051.62 1778.57,3052.23 1778.49,3053.16 1780.56,3055.24 1785.61,3050.19 1785.61,2761.62 1785.6,2761.27 1785.55,2760.92 1785.48,2760.58 1785.37,2760.25 1785.24,2759.93 1785.08,2759.62 1784.89,2759.32 1784.68,2759.05 1784.44,2758.79 1784.18,2758.55 1783.91,2758.34 1783.61,2758.15 1783.3,2757.99 1782.98,2757.86 1782.65,2757.75 1782.31,2757.68 1781.96,2757.63 1781.61,2757.62 1781.26,2757.63 1780.92,2757.68 1780.58,2757.75 1780.24,2757.86 1779.92,2757.99 1779.61,2758.15 1779.32,2758.34 1779.04,2758.55 1778.78,2758.79 1772.64,2764.93
  pour cut-out: 2654.72,2709.21 2654.72,3248.63 2655.82,3250.21 2656.77,3251.87 2657.22,3252.78 2657.3,3252.94 2657.39,3253.09 2657.5,3253.23 2657.61,3253.36 2657.74,3253.47 2657.88,3253.58 2658.03,3253.68 2658.18,3253.76 2658.34,3253.82 2658.51,3253.88 2658.68,3253.92 2658.85,3253.94 2659.02,3253.95 2659.2,3253.94 2659.37,3253.92 2659.54,3253.88 2659.71,3253.83 2659.87,3253.77 2660.03,3253.69 2660.17,3253.59 2660.31,3253.49 2660.44,3253.37 2660.56,3253.24 2660.67,3253.11 2660.71,3253.04 2661.67,3251.68 2661.67,2707.1 2661.66,2706.92 2661.64,2706.75 2661.6,2706.58 2661.55,2706.42 2661.48,2706.25 2661.4,2706.1 2661.3,2705.95 2661.2,2705.81 2661.08,2705.68 2660.95,2705.57 2660.81,2705.46 2660.67,2705.37 2660.51,2705.29 2660.35,2705.22 2660.18,2705.17 2660.01,2705.13 2659.84,2705.11 2659.67,2705.1 2659.49,2705.11 2659.32,2705.13 2659.15,2705.17 2658.98,2705.22 2658.82,2705.29 2658.67,2705.37 2658.52,2705.46 2658.38,2705.57 2658.25,2705.69 2654.72,2709.21
  pour cut-out: 2732.94,2091.32 2732.95,2091.32 2732.74,2091.04 2732.5,2090.78 2732.25,2090.54 2731.97,2090.33 2731.68,2090.14 2731.37,2089.97 2731.05,2089.84 2730.72,2089.73 2730.38,2089.65 2730.03,2089.6 2729.68,2089.58 2729.34,2089.6 2728.99,2089.64 2728.65,2089.71 2728.31,2089.81 2727.99,2089.94 2727.68,2090.1 2727.38,2090.28 2727.1,2090.49 2726.85,2090.73 2726.82,2090.76 2701.62,2115.96 2701.62,2130.53 2701.63,2130.87 2701.68,2131.22 2701.75,2131.56 2701.86,2131.89 2701.99,2132.22 2702.15,2132.52 2702.34,2132.82 2702.55,2133.1 2702.79,2133.35 2703.05,2133.59 2703.32,2133.8 2703.62,2133.99 2703.93,2134.15 2704.25,2134.28 2704.58,2134.39 2704.92,2134.46 2705.27,2134.51 2705.62,2134.52 2705.97,2134.51 2706.31,2134.46 2706.65,2134.39 2706.98,2134.28 2707.31,2134.15 2707.62,2133.99 2707.91,2133.8 2708.19,2133.59 2708.44,2133.35 2739.03,2102.77 2739.27,2102.51 2739.48,2102.23 2739.67,2101.94 2739.83,2101.63 2739.96,2101.31 2740.07,2100.97 2740.14,2100.63 2740.19,2100.29 2740.2,2099.94 2740.19,2099.59 2740.14,2099.24 2740.07,2098.9 2739.96,2098.57 2739.83,2098.25 2739.67,2097.94 2739.48,2097.64 2739.27,2097.37 2739.03,2097.11 2738.77,2096.87 2738.5,2096.66 2738.36,2096.57 2737.01,2095.62 2735.74,2094.55 2734.57,2093.37 2733.51,2092.1 2732.94,2091.32
  pour cut-out: 834.64,1982.57 834.99,1982.55 835.33,1982.51 835.67,1982.43 836.01,1982.33 836.33,1982.19 836.64,1982.03 836.93,1981.85 837.21,1981.63 837.47,1981.4 837.7,1981.14 837.91,1980.86 838.1,1980.57 838.26,1980.26 838.4,1979.94 838.5,1979.6 838.58,1979.26 838.62,1978.92 838.64,1978.57 838.62,1978.22 838.58,1977.87 838.5,1977.53 838.4,1977.2 838.26,1976.88 838.1,1976.57 837.94,1976.31 837.06,1974.9 836.31,1973.42 835.69,1971.89 835.21,1970.3 834.87,1968.68 834.67,1967.03 834.66,1966.99 834.53,1965.14 739.43,1965.14 728.83,1975.74 728.6,1976 728.38,1976.28 728.2,1976.57 728.03,1976.88 727.9,1977.2 727.8,1977.53 727.72,1977.88 727.68,1978.22 727.66,1978.57 727.68,1978.92 727.72,1979.26 727.8,1979.6 727.9,1979.94 728.04,1980.26 728.2,1980.57 728.38,1980.86 728.6,1981.14 728.83,1981.4 729.09,1981.63 729.37,1981.85 729.66,1982.03 729.97,1982.19 730.29,1982.33 730.63,1982.43 730.97,1982.51 731.31,1982.55 731.66,1982.57 834.64,1982.57

## Silkscreen, mask and mechanical layers (free items; w line width, h text height)
Top Overlay:
  pour cut-out: 2678.61,2665.57 2678.61,2695.57 2583.61,2695.57 2583.61,2725.57 2678.61,2725.57 2678.61,2755.57 2723.61,2710.57 2678.61,2665.57
  lines w6: 489.93,1320.27 489.93,926.57 795.76,926.57 ; 489.93,2895.07 489.93,3288.77 883.63,3288.77 ; 2852.13,926.57 3245.83,926.57 3245.83,1320.27 ; 686.78,1123.42 686.78,3091.93 3048.99,3091.93 3048.99,1123.42 686.78,1123.42
  text "POP & SCP" at 1865.28,1818.57 h80 r90
Top Solder:
  rectangle: 575.76,3680 640.76,3800
  rectangle: 455.76,3685 515.76,3795
  rectangle: 3025.76,4460 3120.76,4550
  rectangle: 2775.76,4385 2845.76,4575
  rectangle: 1865.76,4385 1935.76,4580
OUTLINE:
  lines w5: 0,150 ccw(c150,150) 150,0

## Dimensions
235.76,0 to 145.76,4625 on Keep-Out Layer
0,150.76 to 3735.76,145 on Keep-Out Layer

## Text inside footprints (layer, text, board x,y; h text height)
BAT1: PIN_NUMBER "2" at 1085.76,3405 h25 r90; PIN_NUMBER "1" at 1085.76,4005 h25 r90
CON10: PIN_NUMBER "1" at 690.66,1724.04 h25 r90; PIN_NUMBER "2" at 1008.77,1724.04 h25 r90; PIN_NUMBER "4" at 1008.77,1743.72 h25 r90; PIN_NUMBER "3" at 690.66,1743.72 h25 r90; PIN_NUMBER "5" at 690.66,1763.41 h25 r90; PIN_NUMBER "6" at 1008.77,1763.41 h25 r90; PIN_NUMBER "60" at 998.77,2294.91 h25 r90; PIN_NUMBER "69" at 680.66,2393.32 h25 r90; PIN_NUMBER "48" at 998.77,2176.79 h25 r90; PIN_NUMBER "17" at 680.66,1881.51 h25 r90; PIN_NUMBER "10" at 998.77,1802.78 h25 r90; PIN_NUMBER "14" at 998.77,1842.15 h25 r90; PIN_NUMBER "58" at 998.77,2275.21 h25 r90; PIN_NUMBER "56" at 998.77,2255.54 h25 r90; PIN_NUMBER "13" at 680.66,1842.15 h25 r90; PIN_NUMBER "16" at 998.77,1861.83 h25 r90; PIN_NUMBER "11" at 680.66,1822.47 h25 r90; PIN_NUMBER "19" at 680.66,1901.21 h25 r90; PIN_NUMBER "43" at 680.66,2137.42 h25 r90; PIN_NUMBER "41" at 680.66,2117.73 h25 r90; PIN_NUMBER "37" at 680.66,2078.36 h25 r90; PIN_NUMBER "40" at 998.77,2098.06 h25 r90; PIN_NUMBER "38" at 998.77,2078.36 h25 r90; PIN_NUMBER "42" at 998.77,2117.73 h25 r90; PIN_NUMBER "12" at 998.77,1822.47 h25 r90; PIN_NUMBER "76" at 998.77,2452.38 h25 r90; PIN_NUMBER "75" at 680.66,2452.38 h25 r90; PIN_NUMBER "33" at 680.66,2038.99 h25 r90; PIN_NUMBER "30" at 998.77,1999.62 h25 r90; PIN_NUMBER "59" at 680.66,2294.91 h25 r90; PIN_NUMBER "28" at 998.77,1979.94 h25 r90; PIN_NUMBER "26" at 998.77,1960.25 h25 r90; PIN_NUMBER "25" at 680.66,1960.25 h25 r90; PIN_NUMBER "23" at 680.66,1940.58 h25 r90; PIN_NUMBER "27" at 680.66,1979.94 h25 r90; PIN_NUMBER "31" at 680.66,2019.31 h25 r90; PIN_NUMBER "47" at 680.66,2176.79 h25 r90; PIN_NUMBER "46" at 998.77,2157.1 h25 r90; PIN_NUMBER "74" at 998.77,2432.69 h25 r90; PIN_NUMBER "22" at 998.77,1920.88 h25 r90; PIN_NUMBER "36" at 998.77,2058.69 h25 r90; PIN_NUMBER "35" at 680.66,2058.69 h25 r90; PIN_NUMBER "52" at 998.77,2216.17 h25 r90; PIN_NUMBER "20" at 998.77,1901.21 h25 r90; PIN_NUMBER "78" at 998.77,2472.06 h25 r90; PIN_NUMBER "77" at 680.66,2472.06 h25 r90; PIN_NUMBER "45" at 680.66,2157.1 h25 r90; PIN_NUMBER "73" at 680.66,2432.69 h25 r90; PIN_NUMBER "54" at 998.77,2235.84 h25 r90; PIN_NUMBER "44" at 998.77,2137.42 h25 r90; PIN_NUMBER "71" at 680.66,2413.01 h25 r90; PIN_NUMBER "8" at 1008.77,1783.1 h25 r90; PIN_NUMBER "15" at 680.66,1861.83 h25 r90; PIN_NUMBER "18" at 998.77,1881.51 h25 r90; PIN_NUMBER "21" at 680.66,1920.88 h25 r90; PIN_NUMBER "79" at 680.66,2491.75 h25 r90; PIN_NUMBER "80" at 998.77,2491.75 h25 r90; PIN_NUMBER "29" at 680.66,1999.62 h25 r90; PIN_NUMBER "24" at 998.77,1940.58 h25 r90; PIN_NUMBER "7" at 690.66,1783.1 h25 r90; PIN_NUMBER "39" at 680.66,2098.06 h25 r90; PIN_NUMBER "66" at 998.77,2353.95 h25 r90; PIN_NUMBER "67" at 680.66,2373.64 h25 r90; PIN_NUMBER "51" at 680.66,2216.17 h25 r90; PIN_NUMBER "32" at 998.77,2019.31 h25 r90; PIN_NUMBER "9" at 690.66,1802.78 h25 r90; PIN_NUMBER "72" at 998.77,2413.01 h25 r90; PIN_NUMBER "55" at 680.66,2255.54 h25 r90; PIN_NUMBER "57" at 680.66,2275.21 h25 r90; PIN_NUMBER "68" at 998.77,2373.64 h25 r90; PIN_NUMBER "53" at 680.66,2235.84 h25 r90; PIN_NUMBER "34" at 998.77,2038.99 h25 r90; PIN_NUMBER "65" at 680.66,2353.95 h25 r90; PIN_NUMBER "49" at 680.66,2196.47 h25 r90; PIN_NUMBER "61" at 680.66,2314.58 h25 r90; PIN_NUMBER "50" at 998.77,2196.47 h25 r90; PIN_NUMBER "62" at 998.77,2314.58 h25 r90; PIN_NUMBER "70" at 998.77,2393.32 h25 r90; PIN_NUMBER "63" at 680.66,2334.28 h25 r90; PIN_NUMBER "64" at 998.77,2334.28 h25 r90